# EAGLE board Schematic_ProjectTSC_v12 (EAGLE 9.7.0)
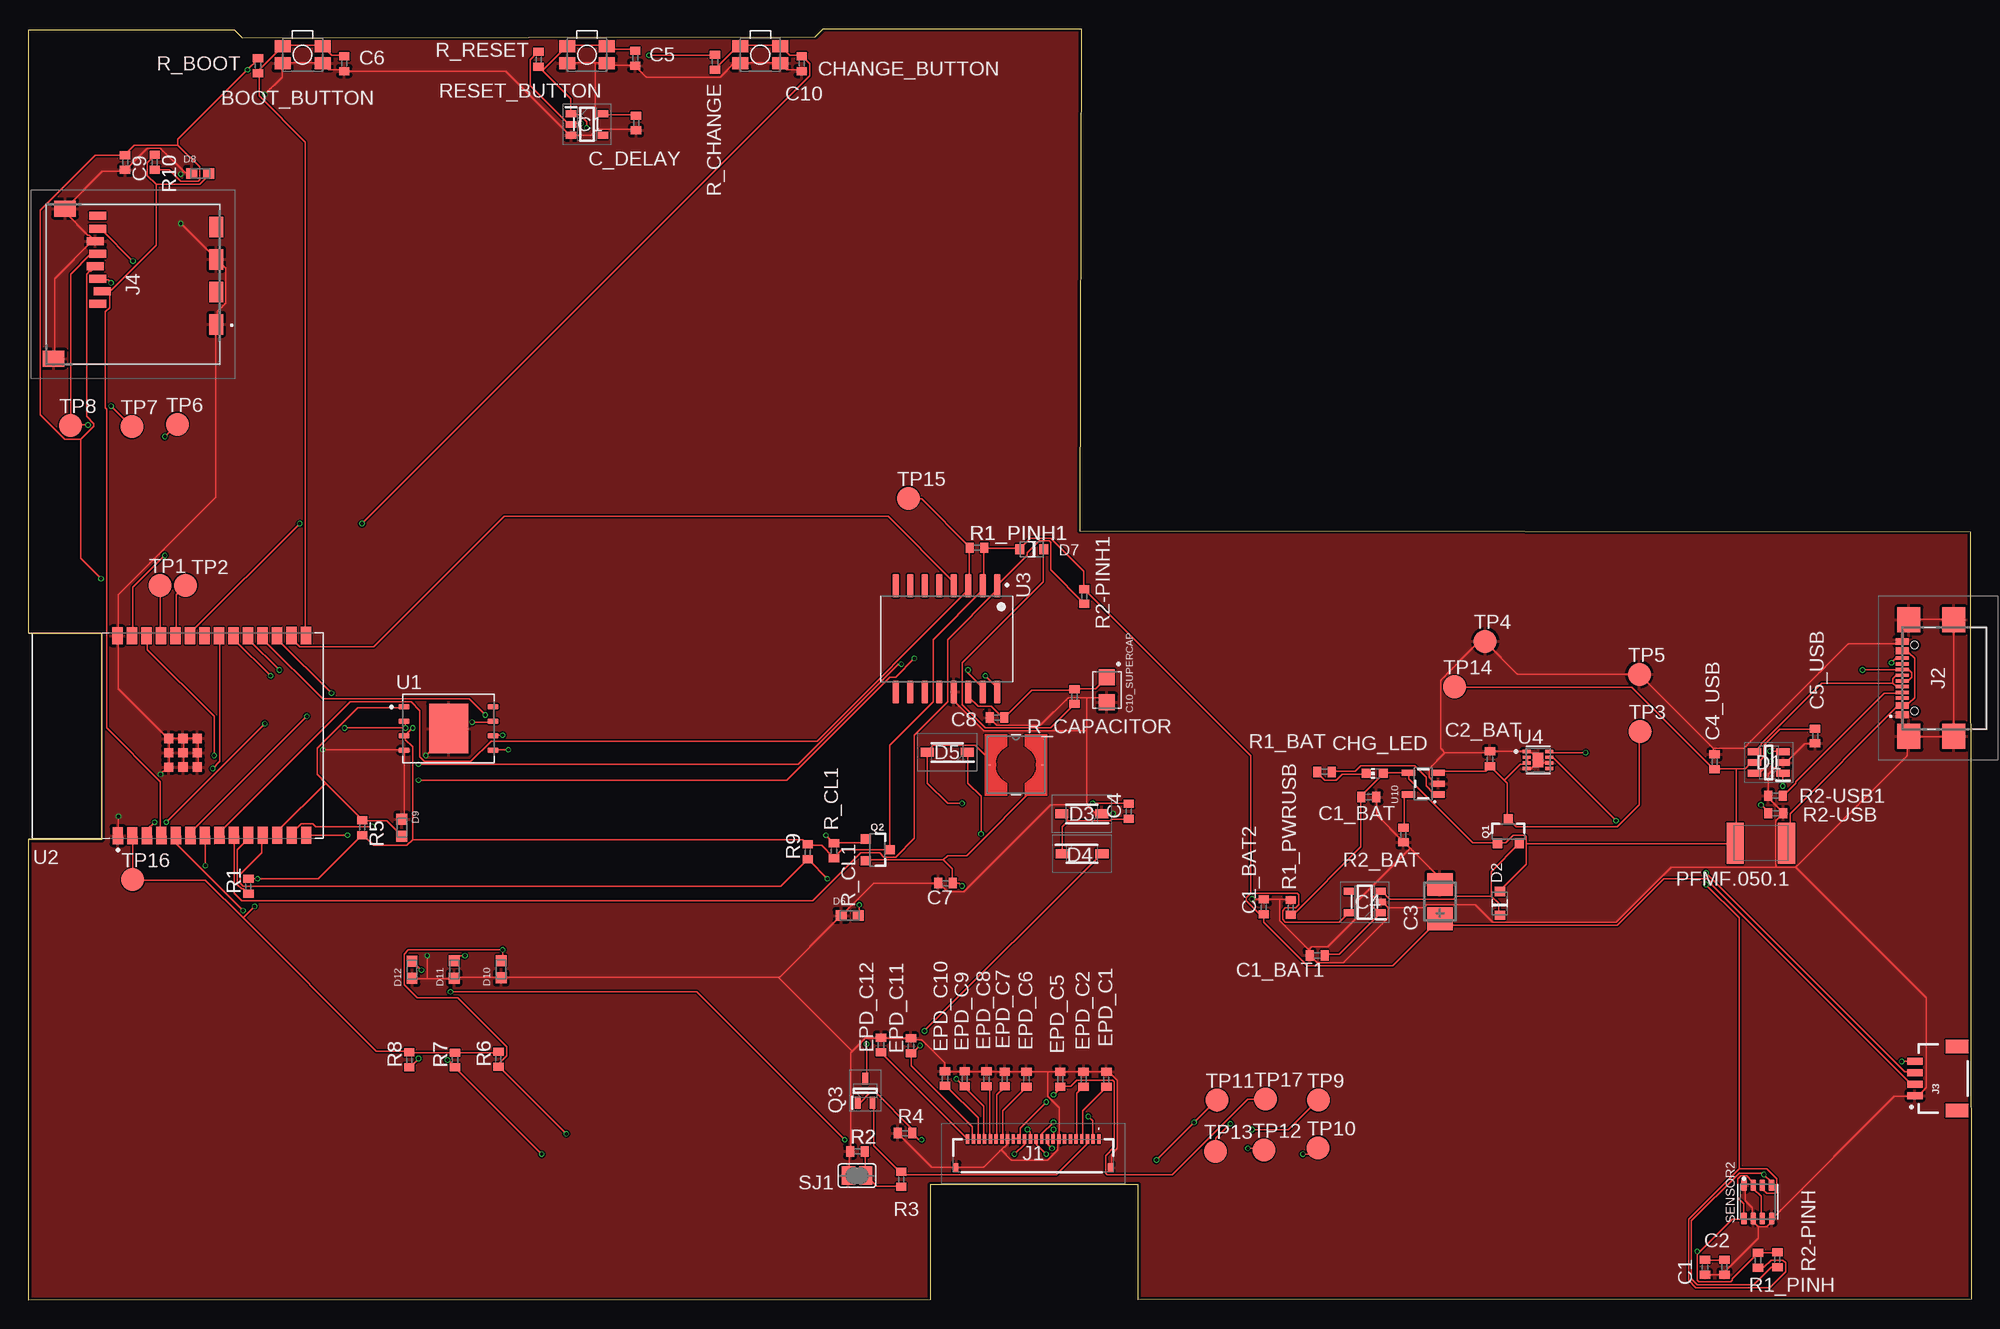
[diagram p0: board, top side]
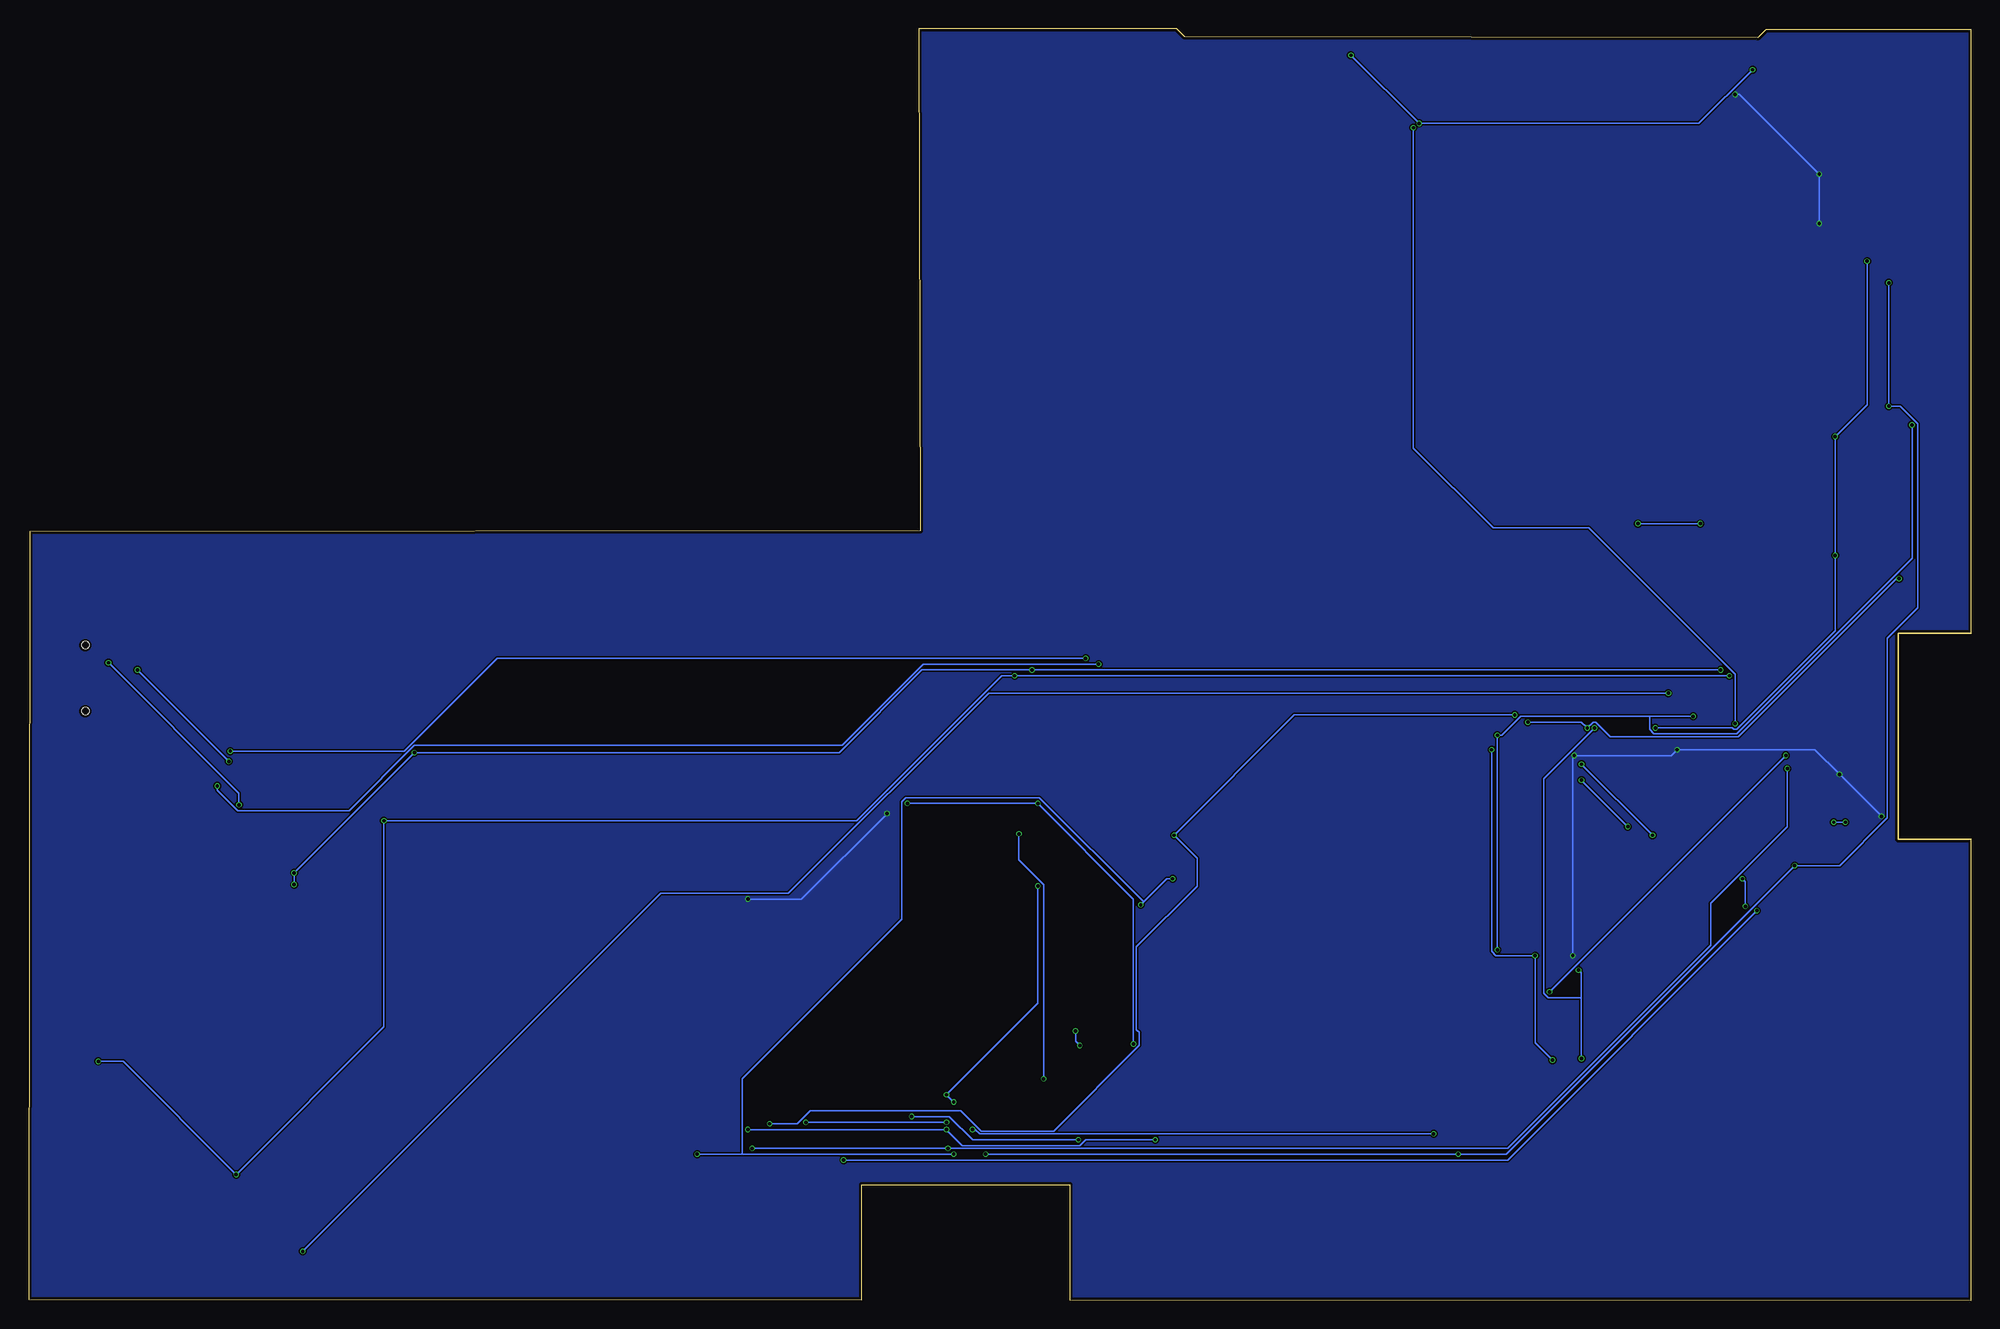
[diagram p1: board, bottom side, seen from below]

Size 170.2 x 111.4 mm. Coordinates in mm from the lower left corner, seen from the top.
Outline: 0,111.3 18,111.3 18.7,110.6 68.9,110.7 69.6,111.4 92.2,111.4 92.1,67.4 170.1,67.3 170.2,0.1 97.2,0.06 97.2,10.1 79,10.1 79,0.05 0,0 0,40.4 6.4,40.4 6.4,58.44 0,58.44 0,58.44 0,111.3
Copper layers (1*16): Top 0.035mm / dielectric 1.6mm / Bottom 0.035mm
Design rules "jlcpcb-2layers.dru": minimum track width 5mil, minimum drill 0.3mm, track to track 5mil, track to pad 5mil, pad to pad 5mil, via to via 5mil, smd to smd 5mil, copper to edge 0.2mm, drill to drill 6mil, minimum pad ring 10mil, minimum via ring 3mil, stop-mask expansion 4mil, vias tented up to drill 0mil, thermal gap 10mil

## Footprints (pad centres in the part's own frame; a part is rotated, then mirrored left to right if it is on the bottom)
MYBUTTON = smd 1.4 x 1.05: 1 1.75,0.75; 2 -1.75,0.75; 3 -1.75,-0.75; 4 1.75,-0.75
EAGLE-LTSPICE_C0402 = smd 0.7 x 0.9: 1 -0.65,0; 2 0.65,0
ESP32_WROVER_EAGLE-LTSPICE_C0402 = smd 0.7 x 0.9: 1 -0.65,0; 2 0.65,0
RCL_CT3528 = smd 2 x 2.2: + -1.5,0; - 1.5,0
CAPCP3225X100N = smd 1.4 x 1.4: 1 -1.1,0; 2 1.1,0
ADAFRUIT_CHIP-LED0603 = smd 0.8 x 0.8: A 0,-0.75; C 0,0.75
SOT95P280X145-6N = smd 1.2 x 0.6: 1 -1.25,0.95; 2 -1.25,0; 3 -1.25,-0.95; 4 1.25,-0.95; 5 1.25,0; 6 1.25,0.95
ESP32_WROVER_AVX---SD0805S020S1R0_AVX_SD0805S020S1R0_0 = smd 0.8 x 0.9: 1 -1.05,0; 2 1.05,0
SOD3716X135N = smd 1.15 x 0.8: 1 -1.75,0; 2 1.75,0
DIOC1608X36N = smd 0.97 x 0.94: 1 -0.75,0; 2 0.75,0
SOT95P280X125-5N = smd 0.9 x 0.6: 1 -1.4,0.95; 2 -1.4,0; 3 -1.4,-0.95; 4 1.4,-0.95; 5 1.4,0.95
SOT95P280X120-5N = smd 0.9 x 0.6: 1 -1.4,0.95; 2 -1.4,0; 3 -1.4,-0.95; 4 1.4,-0.95; 5 1.4,0.95
FH34SRJ24S05SH99 = smd 0.3 x 0.8: 1 5.75,1.45; 2 5.25,1.45; 3 4.75,1.45; 4 4.25,1.45; 5 3.75,1.45; 6 3.25,1.45; 7 2.75,1.45; 8 2.25,1.45; 9 1.75,1.45; 10 1.25,1.45; 11 0.75,1.45; 12 0.25,1.45; 13 -0.25,1.45; 14 -0.75,1.45; 15 -1.25,1.45; 16 -1.75,1.45; 17 -2.25,1.45; 18 -2.75,1.45; 19 -3.25,1.45; 20 -3.75,1.45; 21 -4.25,1.45; 22 -4.75,1.45; 23 -5.25,1.45; 24 -5.75,1.45 | smd 0.4 x 0.8: MP1 6.75,-1.05; MP2 -6.75,-1.05
SAMACSYS_PARTS_USB4110GFA = smd 0.3 x 1.15: A1 -3.35,3.678; A4 -2.55,3.678; A5 -1.25,3.678; A6 -0.25,3.678; A7 0.25,3.678; A8 1.25,3.678; A9 2.55,3.678; A12 3.35,3.678; B1 3.05,3.678; B4 2.25,3.678; B5 1.75,3.678; B6 0.75,3.678; B7 -0.75,3.678; B8 -1.75,3.678; B9 -2.25,3.678; B12 -3.05,3.678 | smd 2.18 x 2: MP1 -5.11,-0.827; MP2 5.11,-0.827; MP3 -5.11,3.103; MP4 5.11,3.103 | hole 0.65: -2.89,2.603; 2.89,2.603
JST04_1MM_RA = smd 0.6 x 1.35: 1 -1.5,0; 2 -0.5,0; 3 0.5,0; 4 1.5,0 | smd 1.2 x 2: NC1 2.8,-3.675; NC2 -2.8,-3.675
112ATAARR03ATTEND = smd 1.8 x 1.2: G1 10.6,10.4; G2 4.9,10.4; S1 7.75,10.4; S2 2.05,10.4 | smd 1.4 x 1.9: G3 13.6,-3.85; G4 0.45,-2.85 | smd 0.7 x 1.5: P1 8.8,0; P2 7.7,0.4; P3 6.6,0; P4 5.5,-0.2; P5 4.4,0; P6 3.3,-0.2; P7 2.2,0; P8 1.1,0
IND_4828-WE-TPC_WRE = smd 0.127 x 0.127: 1 -2.286,0; 2 2.286,0
ESP32C6_VARISTOR_CT/CN1812 = smd 1.5 x 3.6: 1 -2.25,0; 2 2.25,0
ESP32_WROVER_SPARKFUN-DISCRETESEMI_SOT23-3 = smd 0.8 x 0.9: 1 -0.95,-1; 2 0.95,-1; 3 0,1.1
SOT65P210X110-3N = smd 1.05 x 0.5: 1 -1.05,0.65; 2 -1.05,-0.65; 3 1.05,0
ESP32_WROVER_EAGLE-LTSPICE_R0402 = smd 0.7 x 0.9: 1 -0.65,0; 2 0.65,0
ESP32_WROVER_BME680_PSON80P300X300X100-8N = smd 1.016 x 0.5: 1 1.458,1.2; 2 1.458,0.4; 3 1.458,-0.4; 4 1.458,-1.2; 5 -1.458,-1.22; 6 -1.458,-0.4; 7 -1.458,0.4; 8 -1.458,1.2
SJ = smd 1.168 x 1.6: 1 -0.762,0; 2 0.762,0
TP20R = smd 2 x 2: TP 0,0
SON127P600X800X80-9N = smd 0.94 x 0.44: 1 -3.895,1.905; 2 -3.895,0.635; 3 -3.895,-0.635; 4 -3.895,-1.905; 5 3.895,-1.905; 6 3.895,-0.635; 7 3.895,0.635; 8 3.895,1.905 | smd 3.4 x 4.3: 9 0,0
XCVR_ESP32-C6-WROOM-1-N8 = smd 1.5 x 0.9: 1 -8.75,5.26; 2 -8.75,3.99; 3 -8.75,2.72; 4 -8.75,1.45; 5 -8.75,0.18; 6 -8.75,-1.09; 7 -8.75,-2.36; 8 -8.75,-3.63; 9 -8.75,-4.9; 10 -8.75,-6.17; 11 -8.75,-7.44; 12 -8.75,-8.71; 13 -8.75,-9.98; 14 -8.75,-11.25; 15 8.75,-11.25; 16 8.75,-9.98; 17 8.75,-8.71; 18 8.75,-7.44; 19 8.75,-6.17; 20 8.75,-4.9; 21 8.75,-3.63; 22 8.75,-2.36; 23 8.75,-1.09; 24 8.75,0.18; 25 8.75,1.45; 26 8.75,2.72; 27 8.75,3.99; 28 8.75,5.26 | smd 0.8 x 0.8: 29_1 -2.755,0.79; 29_2 -1.505,0.79; 29_3 -0.255,0.79; 29_4 -2.755,-0.46; 29_5 -1.505,-0.46; 29_6 -0.255,-0.46; 29_7 -2.755,-1.71; 29_8 -1.505,-1.71; 29_9 -0.255,-1.71
SOIC127P1032X265-16N = smd 2.05 x 0.59: 1 -4.655,4.445; 2 -4.655,3.175; 3 -4.655,1.905; 4 -4.655,0.635; 5 -4.655,-0.635; 6 -4.655,-1.905; 7 -4.655,-3.175; 8 -4.655,-4.445; 9 4.655,-4.445; 10 4.655,-3.175; 11 4.655,-1.905; 12 4.655,-0.635; 13 4.655,0.635; 14 4.655,1.905; 15 4.655,3.175; 16 4.655,4.445
SON50P200X200X80-9N = smd 0.76 x 0.27: 1 -0.985,0.75; 2 -0.985,0.25; 3 -0.985,-0.25; 4 -0.985,-0.75; 5 0.985,-0.75; 6 0.985,-0.25; 7 0.985,0.25; 8 0.985,0.75 | smd 0.9 x 1.3: 9 0,0
ESP32_WROVER_SPARKFUN-IC-POWER_SOT23-5 = smd 0.55 x 1.2: 1 -0.95,-1.3; 2 0,-1.3; 3 0.95,-1.3; 4 0.95,1.3; 5 -0.95,1.3

## Placement (x,y rotation side)
BOOT_BUTTON  BUTTON_CUSYOMV1  [MYBUTTON]  24,109.09 180 top
C1  100uF  [EAGLE-LTSPICE_C0402]  146.86,2.88 270 top
C1_BAT  4.7uF  [ESP32_WROVER_EAGLE-LTSPICE_C0402]  117.41,44.08 0 top
C1_BAT1  4.7uF  [EAGLE-LTSPICE_C0402]  112.88,30.2 180 top
C1_BAT2  4.7uF  [EAGLE-LTSPICE_C0402]  108.2,34.46 90 top
C2  100nF  [EAGLE-LTSPICE_C0402]  148.56,2.9 270 top
C2_BAT  4.7uF  [ESP32_WROVER_EAGLE-LTSPICE_C0402]  128.02,47.42 90 top
C3  100uF TANT  [RCL_CT3528]  123.64,34.92 90 top
C4  4.7uF/25V  [ESP32_WROVER_EAGLE-LTSPICE_C0402]  96.38,42.82 90 top
C4_USB  100nF  [EAGLE-LTSPICE_C0402]  147.7,47.17 90 top
C5  1uF  [ESP32_WROVER_EAGLE-LTSPICE_C0402]  53.14,108.8 270 top
C5_USB  4.7uF  [EAGLE-LTSPICE_C0402]  156.5,49.42 270 top
C6  100nF  [ESP32_WROVER_EAGLE-LTSPICE_C0402]  27.66,108.32 270 top
C7  10uF  [ESP32_WROVER_EAGLE-LTSPICE_C0402]  80.33,36.54 180 top
C8  100nF  [EAGLE-LTSPICE_C0402]  84.84,51.04 180 top
C9  100nF  [EAGLE-LTSPICE_C0402]  8.46,99.66 270 top
C10  100nF  [ESP32_WROVER_EAGLE-LTSPICE_C0402]  67.74,108.32 270 top
C10_SUPERCAP  CPH3225A  [CAPCP3225X100N]  94.47,53.47 270 top
C_DELAY  100nF  [ESP32_WROVER_EAGLE-LTSPICE_C0402]  53.22,103.12 270 top
CHANGE_BUTTON  BUTTON_CUSYOMV1  [MYBUTTON]  64.11,109.12 180 top
CHG_LED  [ADAFRUIT_CHIP-LED0603]  117.93,46.15 90 top
D1  USBLC6-2SC6Y  [SOT95P280X145-6N]  152.45,47.1 180 top
D2  ESP32_WROVER_AVX---SD0805S020S1R0_AVX_SD0805S020S1R0_0_0AVX_SD0805S020S1R0_0_0  [ESP32_WROVER_AVX---SD0805S020S1R0_AVX_SD0805S020S1R0_0]  128.89,34.76 90 top
D3  MBR0530  [SOD3716X135N]  92.27,42.6 180 top
D4  MBR0530  [SOD3716X135N]  92.29,39.11 0 top
D5  MBR0530  [SOD3716X135N]  80.47,47.99 180 top
D6  PGB1010603MR  [DIOC1608X36N]  71.93,33.7 0 top
D7  ESP32_WROVER_AVX---SD0805S020S1R0_AVX_SD0805S020S1R0_0_0AVX_SD0805S020S1R0_0_0  [ESP32_WROVER_AVX---SD0805S020S1R0_AVX_SD0805S020S1R0_0]  87.89,65.79 180 top
D8  PGB1010603MR  [DIOC1608X36N]  15.03,98.7 0 top
D9  PGB1010603MR  [DIOC1608X36N]  32.7,41.39 270 top
D10  PGB1010603MR  [DIOC1608X36N]  41.4,28.99 90 top
D11  PGB1010603MR  [DIOC1608X36N]  37.3,28.97 90 top
D12  PGB1010603MR  [DIOC1608X36N]  33.6,28.95 90 top
EPD_C1  1uF/50V  [ESP32_WROVER_EAGLE-LTSPICE_C0402]  94.42,19.35 90 top
EPD_C2  1uF/50V  [ESP32_WROVER_EAGLE-LTSPICE_C0402]  92.42,19.36 90 top
EPD_C5  0.1uF/50V  [ESP32_WROVER_EAGLE-LTSPICE_C0402]  90.38,19.36 90 top
EPD_C6  1uF/50V  [ESP32_WROVER_EAGLE-LTSPICE_C0402]  87.42,19.37 90 top
EPD_C7  1uF/50V  [ESP32_WROVER_EAGLE-LTSPICE_C0402]  85.52,19.38 90 top
EPD_C8  1uF/50V  [ESP32_WROVER_EAGLE-LTSPICE_C0402]  83.92,19.39 90 top
EPD_C9  1uF/50V  [ESP32_WROVER_EAGLE-LTSPICE_C0402]  82.02,19.4 90 top
EPD_C10  1uF/50V  [ESP32_WROVER_EAGLE-LTSPICE_C0402]  80.28,19.42 90 top
EPD_C11  1uF/50V  [ESP32_WROVER_EAGLE-LTSPICE_C0402]  77.3,22.28 90 top
EPD_C12  1uF/50V  [ESP32_WROVER_EAGLE-LTSPICE_C0402]  74.68,22.36 90 top
IC1  BD5229G-TR  [SOT95P280X125-5N]  48.92,103 0 top
IC4  XC6220A331MR-G  [SOT95P280X120-5N]  117.05,34.88 180 top
J1  FH34SRJ-24S-0.5SH_99_  [FH34SRJ24S05SH99]  88.01,12.67 0 top
J2  SAMACSYS_PARTS_USB4110-GF-A  [SAMACSYS_PARTS_USB4110GFA]  167.82,54.5 90 top
J3  QWIIC_RIGHT_ANGLE  [JST04_1MM_RA]  165.25,19.43 90 top
J4  112A-TAAR-R03_ATTEND  [112ATAARR03ATTEND]  6.05,96.08 270 top
L1  744043680IND_4828-WE-TPC_WRE  [IND_4828-WE-TPC_WRE]  86.5,46.9 0 top
PFMF.050.1  ESP32C6_VARISTORCN1812  [ESP32C6_VARISTOR_CT/CN1812]  151.75,40.04 180 top
Q1  20V/4.2A/52mΩ/1.4W  [ESP32_WROVER_SPARKFUN-DISCRETESEMI_SOT23-3]  129.63,41.03 0 top
Q2  20V/4.2A/52mΩ/1.4W  [ESP32_WROVER_SPARKFUN-DISCRETESEMI_SOT23-3]  74.33,39.45 270 top
Q3  SI1308EDL-T1-GE3  [SOT65P210X110-3N]  73.29,18.36 90 top
R1  10K  [ESP32_WROVER_EAGLE-LTSPICE_R0402]  19.26,36.26 90 top
R1_BAT  200  [ESP32_WROVER_EAGLE-LTSPICE_R0402]  113.53,46.28 0 top
R1_PINH  10K  [ESP32_WROVER_EAGLE-LTSPICE_R0402]  151.5,3.5 90 top
R1_PINH1  10K  [ESP32_WROVER_EAGLE-LTSPICE_R0402]  83.08,65.92 0 top
R1_PWRUSB  100k  [ESP32_WROVER_EAGLE-LTSPICE_R0402]  110.57,34.41 270 top
R2  2.2  [ESP32_WROVER_EAGLE-LTSPICE_R0402]  72.62,13.04 0 top
R2-PINH  10K  [ESP32_WROVER_EAGLE-LTSPICE_R0402]  153.2,3.56 90 top
R2-PINH1  10K  [ESP32_WROVER_EAGLE-LTSPICE_R0402]  92.48,61.64 90 top
R2-USB  5K1  [ESP32_WROVER_EAGLE-LTSPICE_R0402]  153.06,42.66 0 top
R2-USB1  5k1  [ESP32_WROVER_EAGLE-LTSPICE_R0402]  153.04,44.2 0 top
R2_BAT  2K  [ESP32_WROVER_EAGLE-LTSPICE_R0402]  120.44,40.75 90 top
R3  0.47  [ESP32_WROVER_EAGLE-LTSPICE_R0402]  76.44,10.59 90 top
R4  10K  [ESP32_WROVER_EAGLE-LTSPICE_R0402]  76.78,14.64 0 top
R5  10K  [ESP32_WROVER_EAGLE-LTSPICE_R0402]  29.24,41.4 270 top
R6  10K  [ESP32_WROVER_EAGLE-LTSPICE_R0402]  41.16,21.12 90 top
R7  10K  [ESP32_WROVER_EAGLE-LTSPICE_R0402]  37.36,21.04 90 top
R8  10K  [ESP32_WROVER_EAGLE-LTSPICE_R0402]  33.36,21.06 90 top
R9  10K  [ESP32_WROVER_EAGLE-LTSPICE_R0402]  68.26,39.28 90 top
R10  10K  [ESP32_WROVER_EAGLE-LTSPICE_R0402]  11.06,99.69 270 top
R_BOOT  10K  [ESP32_WROVER_EAGLE-LTSPICE_R0402]  20.1,108.15 90 top
R_CAPACITOR  15  [ESP32_WROVER_EAGLE-LTSPICE_R0402]  91.63,52.89 90 top
R_CHANGE  10K  [ESP32_WROVER_EAGLE-LTSPICE_R0402]  60.13,108.46 90 top
R_CL1  10K  [ESP32_WROVER_EAGLE-LTSPICE_R0402]  70.56,39.36 270 top
R_RESET  10K  [ESP32_WROVER_EAGLE-LTSPICE_R0402]  44.68,108.7 90 top
RESET_BUTTON  BUTTON_CUSYOMV1  [MYBUTTON]  48.92,109.12 180 top
SENSOR2  ESP32_WROVER_BME680_BME680  [ESP32_WROVER_BME680_PSON80P300X300X100-8N]  151.48,8.61 90 top
SJ1  [SJ]  72.58,10.92 0 top
TP1  TPTP20R  [TP20R]  11.53,62.62 0 top
TP2  TPTP20R  [TP20R]  13.75,62.62 0 top
TP3  TPTP20R  [TP20R]  141.17,49.82 0 top
TP4  TPTP20R  [TP20R]  127.59,57.72 0 top
TP5  TPTP20R  [TP20R]  141.11,54.82 0 top
TP6  TPTP20R  [TP20R]  13.03,76.72 0 top
TP7  TPTP20R  [TP20R]  9.05,76.52 0 top
TP8  TPTP20R  [TP20R]  3.67,76.62 0 top
TP9  TPTP20R  [TP20R]  112.99,17.52 0 top
TP10  TPTP20R  [TP20R]  112.97,13.34 0 top
TP11  TPTP20R  [TP20R]  104.11,17.52 0 top
TP12  TPTP20R  [TP20R]  108.22,13.14 0 top
TP13  TPTP20R  [TP20R]  103.97,13.04 0 top
TP14  TPTP20R  [TP20R]  124.92,53.74 0 top
TP15  TPTP20R  [TP20R]  77.07,70.24 0 top
TP16  TPTP20R  [TP20R]  9.12,36.84 0 top
TP17  TPTP20R  [TP20R]  108.36,17.62 0 top
U1  W25Q512JVEIQ  [SON127P600X800X80-9N]  36.8,50.08 0 top
U2  ESP32-C6-WROOM-1-N8  [XCVR_ESP32-C6-WROOM-1-N8]  13.07,49.46 90.1 top
U3  DS3231SN#  [SOIC127P1032X265-16N]  80.42,57.94 270 top
U4  MAX17048G+T10  [SON50P200X200X80-9N]  132.24,47.32 0 top
U10  ESP32_WROVER_SPARKFUN-IC-POWER_MCP73831  [ESP32_WROVER_SPARKFUN-IC-POWER_SOT23-5]  122.18,45.25 90 top

## Library data of the parts
BOOT_BUTTON CHANGE_BUTTON CHG_LED PFMF.050.1 SJ1 TP1-TP17 = DeskAssistant v19 v1
C1 C1_BAT C1_BAT1 C1_BAT2 C2 C2_BAT C4 C4_USB C5 C5_USB C6-C10 C_DELAY EPD_C1 EPD_C2 EPD_C5-EPD_C12 = DeskAssistant v19 v1; SPICEMODEL: NONE; SPICEPREFIX: C
C3 = DeskAssistant v19 v1; SPICEPREFIX: C
C10_SUPERCAP = DeskAssistant v19 v1; AVAILABILITY: Not in stock; CHECK_PRICES: https://www.snapeda.com/parts/CPH3225A/Seiko+Instruments/view-part/?ref=eda; DESCRIPTION: 11 mF (EDLC) Supercapacitor 3.3 V 1210 (3225 Metric) - -; MF: Seiko Instruments; MP: CPH3225A; PACKAGE: 1210 Seiko; PRICE: None; PURCHASE-URL: https://www.snapeda.com/api/url_track_click_mouser/?unipart_id=562593&manufacturer=Seiko Instruments&part_name=CPH3225A&search_term=None; SNAPEDA_LINK: https://www.snapeda.com/parts/CPH3225A/Seiko+Instruments/view-part/?ref=snap
D1 = DeskAssistant v19 v1; AVAILABILITY: In Stock; CHECK_PRICES: https://www.snapeda.com/parts/USBLC6-2SC6Y/STMicroelectronics/view-part/?ref=eda; DESCRIPTION: 17V Clamp 5A (8/20µs) Ipp Tvs Diode Surface Mount SOT-23-6; MF: STMicroelectronics; MP: USBLC6-2SC6Y; PACKAGE: SOT-23-6 STMicroelectronics; PRICE: None; SNAPEDA_LINK: https://www.snapeda.com/parts/USBLC6-2SC6Y/STMicroelectronics/view-part/?ref=snap
D2 = DeskAssistant v19 v1; CENTROID_NOT_SPECIFIED: No; DATASHEET: http://datasheets.avx.com/schottky.pdf; DIGIKEY_DESCRIPTION: DIODE SCHOTTKY 20V 1A 0805; DIGIKEY_PART_NUMBER: 478-7800-1-ND; LEAD_FREE: yes; MF: AVX; MOUSER_PART_NUMBER: 581-SD0805S020S1R0; PACKAGE: 0805 (2012 metric); PREFIX: D; ROHS: yes; SHOW: SD0805S020S1R0; TEMPERATURE_RANGE_HIGH: +125°C; TEMPERATURE_RANGE_LOW: -55°C
D3-D5 = DeskAssistant v19 v1; AVAILABILITY: In Stock; CHECK_PRICES: https://www.snapeda.com/parts/MBR0530/Onsemi/view-part/?ref=eda; DESCRIPTION: Diode Schottky 30 V 500mA Surface Mount SOD-123; MF: ON Semiconductor; MP: MBR0530; PACKAGE: SOD-123-2 ON Semiconductor; PRICE: None; PURCHASE-URL: https://www.snapeda.com/api/url_track_click_mouser/?unipart_id=179458&manufacturer=ON Semiconductor&part_name=MBR0530&search_term=None; SNAPEDA_LINK: https://www.snapeda.com/parts/MBR0530/Onsemi/view-part/?ref=snap
D6 D8-D12 = DeskAssistant v19 v1; AVAILABILITY: In Stock; CHECK_PRICES: https://www.snapeda.com/parts/PGB1010603MR/Littelfuse/view-part/?ref=eda; DESCRIPTION: 150V (Typ) Clamp - Ipp Tvs Diode Surface Mount 0603 (1608 Metric); MF: Littelfuse Inc.; MP: PGB1010603MR; PACKAGE: 0603 Littelfuse Inc.; PRICE: None; PURCHASE-URL: https://www.snapeda.com/api/url_track_click_mouser/?unipart_id=5659453&manufacturer=Littelfuse Inc.&part_name=PGB1010603MR&search_term=None; SNAPEDA_LINK: https://www.snapeda.com/parts/PGB1010603MR/Littelfuse/view-part/?ref=snap
D7 = DeskAssistant v19 v1; CENTROID_NOT_SPECIFIED: No; DATASHEET: http://datasheets.avx.com/schottky.pdf; DIGIKEY_DESCRIPTION: DIODE SCHOTTKY 20V 1A 0805; DIGIKEY_PART_NUMBER: 478-7800-1-ND; LEAD_FREE: yes; MF: AVX; MOUSER_PART_NUMBER: 581-SD0805S020S1R0; PACKAGE: 0805 (2012 metric); PREFIX: D; ROHS: yes; TEMPERATURE_RANGE_HIGH: +125°C; TEMPERATURE_RANGE_LOW: -55°C
IC1 = DeskAssistant v19 v1; DESCRIPTION: Voltage Detector with Adjustable Delay Time: CMOS processes are utilized to develop high precision, low current consumption CMOS reset ICs that allow arbitrary setting of the delay time. The extensive lineup includes both Nch Open Drain and CMOS output types in a wide range of detection voltages (from 2.3V to 6.0V, in 0.1V steps), enabling selection of the ideal solution based on customer requirements. In addition, the entire series is of course both lead-free and RoHS-compliant.; HEIGHT: 1.25mm; MANUFACTURER_NAME: ROHM Semiconductor; MANUFACTURER_PART_NUMBER: BD5229G-TR; MOUSER_PART_NUMBER: 755-BD5229G-TR; MOUSER_PRICE-STOCK: https://www.mouser.co.uk/ProductDetail/ROHM-Semiconductor/BD5229G-TR?qs=4kLU8WoGk0vvnhrrYwdszw%3D%3D
IC4 = DeskAssistant v19 v1; DESCRIPTION: LDO Voltage Regulators; HEIGHT: 1.2mm; MANUFACTURER_NAME: Torex; MANUFACTURER_PART_NUMBER: XC6220A331MR-G; MOUSER_PART_NUMBER: 865-XC6220A331MR-G; MOUSER_PRICE-STOCK: https://www.mouser.co.uk/ProductDetail/Torex-Semiconductor/XC6220A331MR-G?qs=AsjdqWjXhJ8ZSWznL1J0gg%3D%3D
J1 = DeskAssistant v19 v1; DESCRIPTION: 24 Position FFC, FPC Connector Contacts, Top and Bottom 0.020" (0.50mm) Surface Mount, Right Angle; HEIGHT: 1.1mm; MANUFACTURER_NAME: Hirose; MANUFACTURER_PART_NUMBER: FH34SRJ-24S-0.5SH(99); MOUSER_PART_NUMBER: 798-FH34SRJ24S05SH99; MOUSER_PRICE-STOCK: https://www.mouser.co.uk/ProductDetail/Hirose-Connector/FH34SRJ-24S-0.5SH99?qs=vcbW%252B4%252BSTIpKBl5ap9J8Fw%3D%3D
J2 = DeskAssistant v19 v1; DESCRIPTION: CONN USB 2.0 TYPE-C R/A SMT; HEIGHT: 3.26mm; MANUFACTURER_NAME: GCT (GLOBAL CONNECTOR TECHNOLOGY); MANUFACTURER_PART_NUMBER: USB4110-GF-A; MOUSER_PART_NUMBER: 640-USB4110-GF-A; MOUSER_PRICE-STOCK: https://www.mouser.co.uk/ProductDetail/GCT/USB4110-GF-A?qs=KUoIvG%2F9IlYiZvIXQjyJeA%3D%3D
J3 = DeskAssistant v19 v1; PROD_ID: CONN-13694
J4 = DeskAssistant v19 v1; DESCRIPTION: Micro SD Card Socket, Push-Push Type, Top Mount, SMT, H=1.83mm, 10u; HEIGHT: 1.9mm; MANUFACTURER_NAME: ATTEND; MANUFACTURER_PART_NUMBER: 112A-TAAR-R03 ATTEND
L1 = DeskAssistant v19 v1; COPYRIGHT: Copyright (C) 2024 Ultra Librarian. All rights reserved.; MANUFACTURER_PART_NUMBER: 744043680; MFR_NAME: Wurth Electronics
Q1 Q2 = DeskAssistant v19 v1; PROD_ID: TRAN-14388
Q3 = DeskAssistant v19 v1; AVAILABILITY: In Stock; CHECK_PRICES: https://www.snapeda.com/parts/SI1308EDL-T1-GE3/Vishay+Siliconix/view-part/?ref=eda; DESCRIPTION: Si1308EDL-T1-GE3 N-channel MOSFET Transistor, 1.5 A, 30 V, 3-Pin SC-70 | Siliconix / Vishay SI1308EDL-T1-GE3; MF: Vishay Siliconix; MP: SI1308EDL-T1-GE3; PACKAGE: SOT-323 Vishay Semiconductor; PRICE: None; PURCHASE-URL: https://www.snapeda.com/api/url_track_click_mouser/?unipart_id=274603&manufacturer=Vishay Siliconix&part_name=SI1308EDL-T1-GE3&search_term=None; SNAPEDA_LINK: https://www.snapeda.com/parts/SI1308EDL-T1-GE3/Vishay+Siliconix/view-part/?ref=snap
R1 R1_BAT R1_PINH R1_PINH1 R1_PWRUSB R2 R2-PINH R2-PINH1 R2-USB R2-USB1 R2_BAT R3-R10 R_BOOT R_CAPACITOR R_CHANGE R_CL1 R_RESET = DeskAssistant v19 v1; SPICEMODEL: NONE; SPICEPREFIX: R
RESET_BUTTON = DeskAssistant v19 v1; SHOW_NAME: RESET_BUTTON
SENSOR2 = DeskAssistant v19 v1; AVAILABILITY: Unavailable; DESCRIPTION: Integrated Environmental Unit; MF: Bosch Sensortec; MP: BME680; PACKAGE: LGA-8 Bosch Tools; PRICE: None
U1 = DeskAssistant v19 v1; AVAILABILITY: In Stock; CHECK_PRICES: https://www.snapeda.com/parts/W25Q512JVEIQ/Winbond+Electronics/view-part/?ref=eda; DESCRIPTION: FLASH - NOR Memory IC 512Mb (64M x 8) SPI - Quad I/O 133 MHz 8-WSON (8x6); MF: Winbond Electronics; MP: W25Q512JVEIQ; PACKAGE: Package; PRICE: None; SNAPEDA_LINK: https://www.snapeda.com/parts/W25Q512JVEIQ/Winbond+Electronics/view-part/?ref=snap
U2 = DeskAssistant v19 v1; AVAILABILITY: In Stock; CHECK_PRICES: https://www.snapeda.com/parts/ESP32-C6-WROOM-1-N8/Espressif+Systems/view-part/?ref=eda; DESCRIPTION: Multiprotocol Modules ESP32-C6 module, Wi-Fi 6 in 2.4 GHz band, Bluetooth 5, Zigbee 3.0 and Thread. ESP34-WROOM Compatible - ENGINEERING SAMPLE; MF: Espressif Systems; MP: ESP32-C6-WROOM-1-N8; PACKAGE: None; PRICE: None; SNAPEDA_LINK: https://www.snapeda.com/parts/ESP32-C6-WROOM-1-N8/Espressif+Systems/view-part/?ref=snap
U3 = DeskAssistant v19 v1; AVAILABILITY: In Stock; CHECK_PRICES: https://www.snapeda.com/parts/DS3231SN%23/Analog+Devices/view-part/?ref=eda; DESCRIPTION: Extremely Accurate I²C-Integrated RTC/TCXO/Crystal; MF: Analog Devices; MP: DS3231SN#; PACKAGE: SOIC-16 Maxim; PRICE: None; PURCHASE-URL: https://www.snapeda.com/api/url_track_click_mouser/?unipart_id=99048&manufacturer=Analog Devices&part_name=DS3231SN#&search_term=None; SNAPEDA_LINK: https://www.snapeda.com/parts/DS3231SN%23/Analog+Devices/view-part/?ref=snap
U4 = DeskAssistant v19 v1; AVAILABILITY: In Stock; CHECK_PRICES: https://www.snapeda.com/parts/MAX17048G+T10/Analog+Devices/view-part/?ref=eda; DESCRIPTION: 3µA 1-Cell/2-Cell Fuel Gauge with ModelGauge; MF: Analog Devices; MP: MAX17048G+T10; PACKAGE: TDFN-8 Maxim; PRICE: None; PURCHASE-URL: https://www.snapeda.com/api/url_track_click_mouser/?unipart_id=329239&manufacturer=Analog Devices&part_name=MAX17048G+T10&search_term=None; SNAPEDA_LINK: https://www.snapeda.com/parts/MAX17048G+T10/Analog+Devices/view-part/?ref=snap
U10 = DeskAssistant v19 v1; PROD_ID: IC-09995

## Nets
3V3: C1_BAT2.1 C3.+ C9.1 D7.2 IC1.2 IC4.5 J3.2 J4.P4 Q2.3 R1.2 R1_PINH1.2 R2-PINH1.2 R5.2 R6.2 R7.2 R8.2 R9.2 R10.2 R_BOOT.2 R_CHANGE.2 R_CL1.2 R_RESET.2 TP16.TP U1.3 U1.7 U1.8 U2.2 U3.2
32KHZ: R2-PINH1.1 U2.9 U3.1
DN: D1.4 J2.A7 J2.B7
DP: D1.6 J2.A6 J2.B6
EPD_3V3: C7.1 EPD_C5.1 J1.15 J1.16 L1.2 Q2.2 TP17.TP
EPD_3V3_C: Q2.1 R_CL1.1 TP13.TP U2.18
EPD_BUSY: J1.9 TP9.TP U2.26
EPD_CS: D6.2 J1.12 R9.1 TP10.TP U2.11
EPD_DC: J1.11 TP11.TP U2.5
EPD_RST: J1.10 TP12.TP U2.21
FLASH_CS: D9.2 R5.1 U1.1 U2.12
GDR: J1.2 Q3.1 R4.2
GND: BOOT_BUTTON.1 BOOT_BUTTON.2 C1.2 C1_BAT1.2 C1_BAT2.2 C1_BAT.2 C2.2 C2_BAT.2 C3.- C4_USB.2 C5.2 C5_USB.2 C6.2 C7.2 C8.2 C9.2 C10.2 C10_SUPERCAP.2 C_DELAY.2 CHANGE_BUTTON.1 CHANGE_BUTTON.2 D1.2 D3.1 D6.1 D8.1 D9.1 D10.1 D11.1 D12.1 EPD_C1.2 EPD_C2.2 EPD_C5.2 EPD_C6.2 EPD_C7.2 EPD_C8.2 EPD_C9.2 EPD_C10.2 EPD_C11.2 EPD_C12.2 IC1.3 IC4.2 J1.8 J1.17 J1.MP1 J1.MP2 J2.A1 J2.A12 J2.B1 J2.B12 J2.MP1 J2.MP2 J2.MP3 J2.MP4 J3.1 J4.G1 J4.G2 J4.G3 J4.G4 J4.P6 R1_PWRUSB.1 R2-USB1.1 R2-USB.2 R2.1 R2_BAT.1 R4.1 RESET_BUTTON.1 RESET_BUTTON.2 SENSOR2.1 SENSOR2.5 SENSOR2.7 SJ1.1 TP4.TP TP5.TP U1.4 U1.9 U2.1 U2.28 U2.29_1 U2.29_2 U2.29_3 U2.29_4 U2.29_5 U2.29_6 U2.29_7 U2.29_8 U2.29_9 U3.13 U4.1 U4.4 U4.6 U4.9 U10.2
GPIO8: R1.1 U2.10
I2C_PW: R1_PINH.2 R2-PINH.2 SENSOR2.2 SENSOR2.6 SENSOR2.8 U2.17
INT_RTC: R1_PINH1.1 TP15.TP U2.8 U3.3
IO/BOOT: BOOT_BUTTON.3 BOOT_BUTTON.4 C6.1 R_BOOT.1 U2.15
IO/CHANGE: C10.1 CHANGE_BUTTON.3 CHANGE_BUTTON.4 R_CHANGE.1 U2.23
MISO: D12.2 J4.P7 R8.1 TP6.TP U1.2 U2.27
MOSI: D11.2 J1.14 J4.P3 R7.1 TP7.TP U1.5 U2.7
N$1: C1_BAT1.1 D2.1 IC4.1 IC4.3 Q1.2
N$2: J2.B5 R2-USB.1
N$3: R2_BAT.2 U10.5
N$4: J2.A5 R2-USB1.2
N$5: C1.1 C2.1
N$6: C4.1 D3.2 D4.1
N$7: C_DELAY.1 IC1.5
N$8: CHG_LED.C R1_BAT.1
N$9: R1_BAT.2 U10.1
N$15: EPD_C2.1 J1.5
N$16: EPD_C1.1 J1.4
N$19: EPD_C12.1 J1.24
N$20: D7.1 R_CAPACITOR.1
N$21: EPD_C10.1 J1.22
N$23: EPD_C8.1 J1.20
N$24: EPD_C7.1 J1.19
N$25: EPD_C6.1 J1.18
PREVGH: D5.1 EPD_C9.1 J1.21
PREVGL: D4.2 EPD_C11.1 J1.23
RESE: J1.3 Q3.2 R3.2
RESE': R2.2 R3.1 SJ1.2
RESET: C5.1 IC1.1 R_RESET.1 RESET_BUTTON.3 RESET_BUTTON.4 U2.3
RTC_RST: U2.16 U3.4
RX: TP2.TP U2.24
SCK: D10.2 J1.13 J4.P5 R6.1 TP8.TP U1.6 U2.6
SCL: J3.4 R2-PINH.1 SENSOR2.4 U2.20 U3.16 U4.7
SDA: J3.3 R1_PINH.1 SENSOR2.3 U2.19 U3.15 U4.8
SRC: C4.2 D5.2 L1.1 Q3.3
SS_SD: D8.2 J4.P2 R10.1 U2.4
TX: TP1.TP U2.25
USB_D+: D1.1 U2.14
USB_D-: D1.3 U2.13
VBAT: C2_BAT.1 Q1.3 TP3.TP U4.2 U4.3 U10.3
VBUS: C1_BAT.1 C4_USB.1 C5_USB.1 CHG_LED.A D1.5 D2.2 PFMF.050.1.2 Q1.1 R1_PWRUSB.2 TP14.TP U10.4
VRTC: C8.1 C10_SUPERCAP.1 R_CAPACITOR.2 U3.14
VUSB: J2.A4 J2.A9 J2.B4 J2.B9 PFMF.050.1.1

## Tracks (layer width: path | path; a pad name or v marks a point on that pad's centre or on a via)
3V3  (via drill 0.3)
  Top 0.127: R_RESET.2 44.58,109.31 43.94,108.68 43.94,106.39 47.24,103.09 47.5,103.09 IC1.2 47.62,103.09 v48.39,103.09 | v54.36,109.06 60.07,109.06 R_CHANGE.2 | 13.08,101.18 14.99,99.28 14.99,98.14 14.86,98.01 13.34,98.01 12.32,99.02 11.18,99.02 R10.2 | 13.08,101.18 9.27,101.18 8.51,100.42 C9.1 8.38,100.29 5.84,100.29 1.02,95.47 1.02,77.56 3.17,75.4 4.57,75.4 | 13.08,101.18 13.08,101.69 v19.18,107.79 20.07,108.68 R_BOOT.2 | 4.57,75.4 5.71,76.55 5.71,76.8 5.08,77.43 5.08,89.88 5.33,90.13 5.46,90.13 5.84,90.52 J4.P4 | 107.06,35.65 106.68,35.27 106.68,35.02 107.82,33.87 108.08,33.87 C1_BAT2.1 108.2,33.75 108.2,33.11 112.01,29.3 119.51,29.3 123.57,33.36 C3.+ 123.7,33.36 124.21,32.86 139.19,32.86 143.26,36.92 147.07,36.92 147.45,36.54 147.45,36.41 164.85,19.01 165.23,19.01 J3.2 | 107.06,35.65 111.12,35.65 111.25,35.52 111.25,34.64 111,34.38 110.11,34.38 109.86,34.13 109.86,33.36 110.11,33.11 114.81,33.11 115.57,33.87 IC4.5 | U2.2 9.14,40.6 9.14,36.92 TP16.TP 9.14,36.79 15.49,36.79 18.8,33.49 | R6.2 41.15,21.68 37.47,21.68 R7.2 37.34,21.68 33.4,21.68 R8.2 33.27,21.81 30.48,21.81 18.8,33.49 | U1.8 40.77,51.91 40.77,50.76 U1.7 40.64,50.64 v38.86,50.64 | R1.2 19.3,36.92 v20.07,36.92 25.4,36.92 29.21,40.73 R5.2 29.34,40.73 30.23,39.84 33.15,39.84 33.66,40.35 | 33.66,40.35 33.66,48.48 33.02,49.11 33.02,49.37 U1.3 33.02,49.49 v33.66,50.13 | 33.66,40.35 67.82,40.35 68.2,39.97 R9.2 68.33,39.84 69.47,39.84 70.48,38.83 R_CL1.2 70.61,38.83 71.25,39.46 75.31,39.46 Q2.3 75.44,39.46 75.44,48.61 79.25,52.42 79.25,57.88 83.57,62.19 83.57,62.58 U3.2 83.69,62.7 83.69,65.88 R1_PINH1.2 83.82,65.88 86.74,65.88 D7.2 86.87,65.88 87.76,66.77 89.53,66.77 92.46,63.84 92.46,62.32 R2-PINH1.2 92.58,62.19 107.06,47.72 107.06,35.65
  Top 0.127: v19.81,34.51 18.8,33.49 | 4.57,75.4 4.57,64.99 v6.35,63.21
  Bottom 0.127: v54.36,109.06 v48.39,103.09 23.88,103.09 v19.18,107.79 | v38.86,50.64 34.16,50.64 v33.66,50.13 33.15,50.64 32.89,50.64 31.62,49.37 20.45,49.37 6.6,63.21 v6.35,63.21 | v19.81,34.51 19.81,36.67 v20.07,36.92
32KHZ
  Top 0.127: R2-PINH1.1 92.46,61.05 89.53,63.97 89.53,66.39 89.41,66.51 88.52,66.51 87.5,65.5 87.5,65.24 84.96,62.7 U3.1 84.84,62.58 84.84,62.19 80.52,57.88 80.52,52.42 77.6,49.49 77.6,40.48 75.95,38.83 74.93,38.83 74.55,39.21 72.9,39.21 68.71,35.02 18.67,35.02 18.03,35.65 18.03,40.6 U2.9
DN
  Top 0.127: 163.32,54.07 163.58,53.81 164.08,53.81 J2.B7 | 163.32,54.07 163.32,54.45 163.58,54.7 164.08,54.7 J2.A7 | 163.32,54.07 157.1,54.07 151.76,48.73 151.76,48.61 151.26,48.1 D1.4
DP  (via drill 0.3)
  Top 0.127: J2.A6 164.21,54.32 164.72,54.32 164.97,54.57 164.97,54.95 164.72,55.21 164.21,55.21 J2.B6 164.08,55.21 v160.66,55.21 | v152.65,47.21 151.64,46.19 151.26,46.19 D1.6
  Bottom 0.127: v160.66,55.21 v152.65,47.21
EPD_3V3  (via drill 0.3)
  Top 0.127: 80.14,38.57 73.41,38.57 Q2.2 | 80.14,38.57 80.52,38.95 82.17,38.95 88.77,45.56 88.77,46.95 L1.2 | 80.14,38.57 80.9,37.81 80.9,36.54 C7.1 81.53,36.54 v81.79,36.29 | J1.16 86.36,14.19 86.74,14.19 J1.15 86.87,14.19 86.87,15.08 v89.15,17.36 | TP17.TP 108.33,17.62 106.81,17.62 100.2,11.01 94.49,11.01 94.36,11.14 94.36,12.66 95.12,13.43 95.12,19.14 95,19.27 91.82,19.27 91.31,18.76 90.42,18.76 EPD_C5.1 90.42,18.63 v89.79,18
  Bottom 0.127: v89.15,17.36 v89.79,18 81.79,26 v81.79,36.29
EPD_3V3_C  (via drill 0.3)
  Top 0.127: Q2.1 73.28,40.35 73.03,40.1 70.61,40.1 R_CL1.1 70.48,40.1 v69.85,40.73 | v40.01,51.27 38.61,52.67 25.78,52.67 20.57,57.88 20.57,58.13 U2.18 | v105.28,15.46 104.01,14.19 104.01,13.04 TP13.TP
  Bottom 0.127: v40.01,51.27 59.31,51.27 v69.85,40.73 67.82,38.7 67.82,36.29 73.15,30.95 73.15,23.71 72.9,23.46 72.9,22.32 80.39,14.82 86.74,14.82 88.52,16.6 101.73,16.6 102.87,15.46 v105.28,15.46
EPD_BUSY  (via drill 0.3)
  Top 0.127: v89.79,14.95 89.79,14.19 J1.9 | v107.19,14.95 110.36,14.95 112.9,17.49 TP9.TP | v16.26,47.72 16.26,51.14 10.41,56.99 10.41,58.13 U2.26 | v36.96,27.01 58.55,27.01 v71.5,14.06
  Bottom 0.127: v107.19,14.95 v89.79,14.95 88.39,13.55 78.11,13.55 77.6,14.06 v71.5,14.06 | v36.96,27.01 v16.26,47.72
EPD_CS  (via drill 0.3)
  Top 0.127: v89.15,12.79 88.27,13.68 88.27,14.06 J1.12 | v111.63,12.79 112.39,12.79 112.9,13.3 TP10.TP | v69.98,36.92 68.33,38.57 R9.1 68.2,38.57 65.91,36.29 18.8,36.29 18.54,36.54 18.54,37.3 20.45,39.21 20.45,40.6 U2.11 | v72.77,34.64 72.77,33.75 D6.2
  Bottom 0.127: v111.63,12.79 107.7,12.79 | 107.7,12.79 v89.15,12.79 | v69.98,36.92 70.48,36.92 72.52,34.89 | v72.77,34.64 72.52,34.89 | 107.7,12.79 107.7,19.39 93.73,33.36 93.73,43.65 93.34,44.03 81.66,44.03 72.52,34.89
EPD_DC  (via drill 0.3)
  Top 0.127: v89.79,15.58 88.77,14.57 88.77,14.19 J1.11 | TP11.TP 104.01,17.49 v102.11,15.58 v98.81,12.28 | v18.8,34.13 12.95,39.97 12.95,40.6 U2.5
  Bottom 0.127: v102.11,15.58 v89.79,15.58 | v18.8,34.13 40.64,12.28 v98.81,12.28
EPD_RST  (via drill 0.3)
  Top 0.127: v89.66,13.3 89.28,13.68 89.28,14.06 J1.10 | v106.81,13.3 108.08,13.3 108.2,13.17 TP12.TP | v16.13,46.57 16.76,47.21 16.76,58.13 U2.21
  Bottom 0.127: v106.81,13.3 v89.66,13.3 40.64,13.3 22.86,31.08 22.86,34.76 16.13,41.49 v16.13,46.57
FLASH_CS
  Top 0.127: D9.2 32.64,40.73 31.37,42 29.34,42 R5.1 29.21,42.13 26.04,45.3 | 26.04,45.3 25.27,46.06 25.27,48.35 28.83,51.91 32.89,51.91 U1.1 | 26.04,45.3 21.84,41.11 21.84,40.73 U2.12
GDR  (via drill 0.3)
  Top 0.127: v92.84,16.09 93.22,15.71 93.22,14.19 J1.2 | v78.23,14.06 77.98,14.06 77.47,14.57 R4.2 77.34,14.7 77.34,15.08 74.3,18.12 73.66,18.12 72.9,17.36 72.64,17.36 Q3.1
  Bottom 0.127: v92.84,16.09 89.53,16.09 87.5,14.06 v78.23,14.06
GND  (via drill 0.3)
  Top 0.127: 147.57,48.35 147.57,47.84 C4_USB.2 | 147.57,48.35 141.22,54.7 TP5.TP 141.1,54.83 130.43,54.83 127.64,57.62 TP4.TP 127.51,57.62 127,57.62 123.7,54.32 123.7,48.35 124.08,47.97 | U4.4 131.32,46.57 131.57,46.57 132.21,47.21 U4.9 | U4.9 132.33,47.34 131.7,47.97 131.32,47.97 U4.1 131.19,48.1 128.14,48.1 C2_BAT.2 128.02,47.97 124.08,47.97 | U4.6 133.22,47.08 132.46,47.08 132.33,47.21 U4.9 | 124.08,47.97 122.68,46.57 122.68,45.81 123.19,45.3 123.44,45.3 U10.2 | C1.2 146.94,2.25 C2.2 148.59,2.25 148.59,2.5 151.51,5.43 151.51,6.44 | 151.51,6.44 151.13,6.82 151.13,7.08 SENSOR2.7 151,7.2 151,8.09 150.37,8.73 150.37,10 SENSOR2.1 | 151.51,6.44 152.27,6.44 152.65,6.82 152.65,7.08 SENSOR2.5 152.78,7.2 163.45,17.87 165.23,17.87 J3.1 165.35,18 165.61,18 166.24,18.63 166.24,26.51 154.81,37.94 | C1_BAT.2 118.11,44.03 118.11,42.51 120.4,40.22 R2_BAT.1 120.52,40.1 121.03,39.59 | 121.03,39.59 123.57,37.05 123.57,36.54 C3.- | 109.6,35.14 110.49,35.14 R1_PWRUSB.1 | 109.6,35.14 108.2,35.14 C1_BAT2.2 108.08,35.14 v107.19,35.14 | 112.14,30.7 112.14,30.32 C1_BAT1.2 112.27,30.19 112.9,29.55 115.19,29.55 119.13,33.49 119.13,34.38 | 112.14,30.7 109.6,33.24 109.6,35.14 | 119.13,34.38 118.75,34.76 118.49,34.76 IC4.2 | 121.03,39.59 116.33,34.89 116.33,33.49 113.79,30.95 112.39,30.95 112.14,30.7 | C5_USB.2 156.46,48.73 155.57,48.73 154.05,47.21 153.8,47.21 D1.2 153.67,47.08 153.42,47.08 152.4,46.06 152.4,44.29 R2-USB1.1 152.27,44.16 153.67,42.76 R2-USB.2 153.67,42.64 153.03,42 153.03,38.06 153.16,37.94 | J2.B12 164.08,51.4 164.08,51.27 J2.A1 164.21,51.14 164.21,49.88 164.59,49.49 J2.MP3
  Top 0.127: J2.MP3 164.72,49.37 168.53,49.37 J2.MP1 168.66,49.49 168.66,59.53 J2.MP2 168.53,59.65 164.72,59.65 J2.MP4 164.59,59.53 164.21,59.15 164.21,57.88 J2.A12 164.08,57.75 164.08,57.62 J2.B1 164.08,57.5 159.38,57.5 150.24,48.35 147.57,48.35 | 154.81,37.94 153.16,37.94 | 154.81,37.94 164.59,47.72 164.59,49.37 J2.MP3 | 119.13,34.38 122.17,34.38 122.43,34.64 126.75,34.64 128.27,33.11 139.06,33.11 143.89,37.94 153.16,37.94 | 85.22,13.17 85.72,13.68 85.72,14.06 J1.17 | 85.22,13.17 83.69,11.65 81.28,11.65 J1.MP2 81.15,11.65 79.12,11.65 76.2,14.57 R4.1 | 85.22,13.17 86.11,12.28 89.28,12.28 90.17,13.17 90.17,14.06 J1.8 90.3,14.19 90.3,16.86 89.28,17.87 89.28,20.03 | J1.MP1 94.87,11.65 94.87,12.79 95.38,13.3 95.38,19.27 94.74,19.9 94.49,19.9 EPD_C1.2 94.36,20.03 92.46,20.03 EPD_C2.2 92.33,20.03 90.42,20.03 EPD_C5.2 90.3,20.03 89.28,20.03 | SJ1.1 71.88,11.01 71.88,12.92 R2.1 72.01,13.04 72.01,21.68 72.14,21.81 | 72.14,21.81 73.28,22.95 74.68,22.95 EPD_C12.2 74.8,22.95 77.22,22.95 EPD_C11.2 77.34,22.82 78.23,22.82 80.26,20.79 80.26,20.16 EPD_C10.2 80.39,20.03 81.92,20.03 EPD_C9.2 82.04,20.03 83.82,20.03 EPD_C8.2 83.95,20.03 EPD_C7.2 87.38,20.03 EPD_C6.2 87.5,20.03 89.28,20.03 | 92.71,52.8 93.98,52.8 94.36,52.42 C10_SUPERCAP.2 | 92.71,52.8 91.06,52.8 88.65,50.38 84.84,50.38 84.2,51.02 C8.2 | 92.71,43.4 93.47,42.64 93.98,42.64 D3.1 94.11,42.64 v95,42.64 | 92.71,52.8 92.71,49.88 | 92.71,49.88 92.71,43.4 | 92.71,49.88 83.69,49.88 81.15,52.42 81.15,53.18 U3.13 | 34.92,28.16 37.21,28.16 D11.1 37.34,28.29 41.27,28.29 D10.1 41.4,28.29 65.66,28.29 | 34.92,28.16 33.66,28.16 D12.1
  Top 0.127: 65.66,28.29 65.79,28.29 71.12,33.62 D6.1 71.25,33.75 74.04,36.54 C7.2 79.76,36.54 80.52,35.78 81.92,35.78 89.53,43.4 92.71,43.4 | 65.66,28.29 72.14,21.81 | C10.2 67.69,107.79 66.42,107.79 65.91,108.3 CHANGE_BUTTON.2 65.79,108.42 62.48,108.42 CHANGE_BUTTON.1 62.36,108.3 61.72,108.3 60.58,107.15 54.1,107.15 53.21,108.04 C5.2 53.09,108.17 50.8,108.17 50.67,108.3 RESET_BUTTON.2 50.55,108.42 49.66,108.42 | 49.78,102.58 49.28,102.07 47.62,102.07 IC1.3 47.5,101.95 41.78,107.66 27.69,107.66 C6.2 27.56,107.79 26.29,107.79 25.78,108.3 BOOT_BUTTON.2 25.65,108.42 22.35,108.42 BOOT_BUTTON.1 22.23,108.3 22.23,107.15 v20.7,105.63 | 49.78,102.58 53.21,102.58 C_DELAY.2 | 49.66,108.42 47.24,108.42 RESET_BUTTON.1 | 49.78,102.58 49.78,103.34 49.66,103.47 49.66,108.42 | 13.59,98.9 11.56,100.93 10.41,100.93 8.51,99.02 C9.2 8.38,98.9 6.48,98.9 3.3,95.72 J4.G4 3.3,95.59 3.3,95.21 5.21,93.31 5.33,93.31 5.71,92.93 | 13.59,98.9 13.72,98.77 14.22,98.77 D8.1 | 5.71,92.93 5.84,92.8 J4.P6 5.71,92.93 | 5.71,92.93 2.29,89.5 2.29,82.51 J4.G3 | D9.1 32.77,42.25 32.89,42.38 32.89,48.1 U1.4 32.89,48.22 v25.78,48.22 | U2.29_7 14.86,46.83 14.86,47.84 U2.29_8 14.86,47.97 14.86,49.11 U2.29_9 14.73,49.24 13.59,49.24 U2.29_6 | U2.29_4 13.59,46.83 13.59,47.84 U2.29_5 13.59,47.97 13.59,49.11 U2.29_6 | U2.29_3 12.32,49.24 13.46,49.24 U2.29_6 | U2.29_3 12.32,49.11 12.32,47.97 U2.29_2 12.32,47.84 12.32,46.83 U2.29_1 12.19,46.7 v11.56,46.06 | U2.29_3 12.19,49.24 7.87,53.56 7.87,58.13 U2.28 7.87,58.26 7.87,61.81 16.38,70.32 16.38,85.44 J4.G1 16.51,85.56 16.51,86.58 17.27,87.34 17.27,90.39 16.51,91.15 J4.G2 16.38,91.28 v13.34,94.33
  Top 0.127: v7.87,42.38 7.87,40.73 U2.1 | v34.8,47.72 36.7,49.62 36.7,50 U1.9 | v13.34,98.64 13.59,98.9 | v34.92,30.19 34.92,28.16
  Bottom 0.127: v7.87,42.38 v11.56,46.06 13.72,48.22 v25.78,48.22 26.29,47.72 v34.8,47.72 34.92,47.59 v34.92,30.19 | v13.34,94.33 v13.34,98.64 20.32,105.63 v20.7,105.63 | v107.19,35.14 102.49,35.14 v95,42.64
  pour Bottom: 6.46,40.36 6.44,40.34 6.42,40.32 0.08,40.32 0.08,0.08 78.92,0.12 78.92,10.12 78.94,10.14 78.96,10.16 78.98,10.18 97.21,10.18 97.24,10.16 97.26,10.14 97.27,10.12 97.27,0.13 170.12,0.18 170.02,67.22 92.12,67.32 92.11,67.32 92.1,67.32 92.08,67.32 92.08,67.32 92.08,67.32 92.07,67.33 92.06,67.34 92.06,67.34 92.06,67.34 92.05,67.35 92.04,67.36 92.04,67.36 92.04,67.36 92.03,67.37 92.02,67.38 92.02,67.38 92.02,67.39 92.02,67.4 92.02,67.42 92.02,67.42 92.12,111.32 69.63,111.32 68.95,110.65 68.94,110.64 68.94,110.64 68.94,110.64 68.93,110.63 68.92,110.62 68.92,110.62 68.92,110.62 68.9,110.62 18.72,110.52 18.72,110.52 18.7,110.52 18.68,110.52 18.68,110.52 18.68,110.52 18.67,110.53 18.66,110.54 18.66,110.54 18.66,110.54 18.65,110.55 18.64,110.56 18.64,110.56 17.97,111.22 0.08,111.22 0.08,58.52 6.42,58.52 6.44,58.51 6.46,58.48 6.48,58.46 6.48,40.38
  pour Top: 6.46,40.36 6.44,40.34 6.42,40.32 0.08,40.32 0.08,0.08 78.92,0.12 78.92,10.12 78.94,10.14 78.96,10.16 78.98,10.18 97.21,10.18 97.24,10.16 97.26,10.14 97.27,10.12 97.27,0.13 170.12,0.18 170.02,67.22 92.12,67.32 92.11,67.32 92.1,67.32 92.08,67.32 92.08,67.32 92.08,67.32 92.07,67.33 92.06,67.34 92.06,67.34 92.06,67.34 92.05,67.35 92.04,67.36 92.04,67.36 92.04,67.36 92.03,67.37 92.02,67.38 92.02,67.38 92.02,67.39 92.02,67.4 92.02,67.42 92.02,67.42 92.12,111.32 69.63,111.32 68.95,110.65 68.94,110.64 68.94,110.64 68.94,110.64 68.93,110.63 68.92,110.62 68.92,110.62 68.92,110.62 68.9,110.62 18.72,110.52 18.72,110.52 18.7,110.52 18.68,110.52 18.68,110.52 18.68,110.52 18.67,110.53 18.66,110.54 18.66,110.54 18.66,110.54 18.65,110.55 18.64,110.56 18.64,110.56 17.97,111.22 0.08,111.22 0.08,58.52 6.42,58.52 6.44,58.51 6.46,58.48 6.48,58.46 6.48,40.38
GPIO8
  Top 0.127: R1.1 19.18,35.65 18.8,36.03 18.67,36.03 18.29,36.41 18.29,39.46 19.18,40.35 19.18,40.6 U2.10
I2C_PW  (via drill 0.3)
  Top 0.127: R2-PINH.2 153.16,4.15 R1_PINH.2 151.38,4.03 149.22,1.87 149.22,1.74 149.1,1.61 146.3,1.61 146.18,1.74 146.18,4.03 146.3,4.15 | SENSOR2.6 151.76,7.2 151.76,9.11 151.13,9.74 151.13,10 SENSOR2.2 151,10.12 151,10.38 150.5,10.89 149.99,10.89 149.73,10.63 149.73,8.98 150.24,8.47 150.24,7.2 SENSOR2.8 150.24,7.08 149.22,7.08 146.3,4.15 | v26.54,53.18 21.84,57.88 21.84,58.13 U2.17 | 146.3,4.15 v146.18,4.28
  Bottom 0.127: v26.54,53.18 86.11,53.18 103.63,35.65 114.81,35.65 v146.18,4.28
INT_RTC
  Top 0.127: U2.8 16.76,40.73 16.76,40.98 28.19,52.42 33.53,52.42 34.29,51.65 34.29,47.59 34.67,47.21 38.73,47.21 40.51,48.99 69.09,48.99 82.3,62.19 82.3,62.58 U3.3 82.42,62.7 82.42,65.88 R1_PINH1.1 82.42,66 78.23,70.2 77.09,70.2 TP15.TP
IO/BOOT
  Top 0.127: C6.1 27.56,109.06 26.54,109.06 25.78,109.82 BOOT_BUTTON.3 25.65,109.95 22.35,109.95 BOOT_BUTTON.4 22.23,109.82 20.19,107.79 20.19,107.53 R_BOOT.1 20.19,107.41 20.19,105.5 24.26,101.44 24.26,58.26 U2.15
IO/CHANGE  (via drill 0.3)
  Top 0.127: R_CHANGE.1 60.2,107.91 62.1,109.82 62.36,109.82 CHANGE_BUTTON.4 62.48,109.95 65.79,109.95 CHANGE_BUTTON.3 65.91,109.82 66.67,109.06 67.69,109.06 C10.1 67.82,108.93 68.45,108.3 68.45,107.28 v29.21,68.04 | v23.75,68.04 14.22,58.51 14.22,58.26 U2.23
  Bottom 0.127: v29.21,68.04 v23.75,68.04
MISO  (via drill 0.3)
  Top 0.127: v34.16,21.17 33.4,20.41 R8.1 | v34.42,28.92 33.66,29.68 D12.2 | U1.2 33.02,50.64 v33.02,50.13 v27.69,50.13 | v11.94,65.24 9.14,62.45 9.14,58.26 U2.27 | v11.94,75.66 12.95,76.67 TP6.TP | v9.14,91.02 6.35,93.82 6.1,93.82 J4.P7
  Bottom 0.127: 34.16,26.51 34.16,28.67 v34.42,28.92 | 34.16,26.51 v34.16,21.17 | v33.02,50.13 37.47,45.68 37.47,26.89 37.08,26.51 34.16,26.51 | v9.14,91.02 9.14,78.45 v11.94,75.66 v11.94,65.24 11.94,58.64 20.57,50 20.83,50 20.95,50.13 v27.69,50.13
MOSI  (via drill 0.3)
  Top 0.127: v42.04,48.22 40.77,48.22 U1.5 | v38.23,30.19 37.72,30.19 37.34,29.81 D11.2 | v7.24,89.12 6.99,89.37 6.1,89.37 J4.P3 | v7.24,78.32 9.02,76.55 TP7.TP | v86.36,12.79 87.25,13.68 87.25,14.06 J1.14 | v44.96,12.79 37.47,20.28 R7.1 37.34,20.41 v36.7,21.05 | v15.49,38.06 15.49,40.6 U2.7
  Bottom 0.127: v42.04,48.22 42.04,30.57 41.66,30.19 v38.23,30.19 38.23,22.57 v36.7,21.05 | v7.24,89.12 v7.24,78.32 6.22,78.32 4.7,76.8 4.7,60.67 7.37,58 7.37,42.25 11.56,38.06 v15.49,38.06 40.77,12.79 v44.96,12.79 v86.36,12.79
N$1
  Top 0.127: 128.14,35.4 128.78,34.76 128.78,33.75 D2.1 | 128.14,35.4 128.14,37.56 130.56,39.97 Q1.2 | 118.36,33.87 114.81,30.32 113.54,30.32 C1_BAT1.1 | 118.36,33.87 117.73,34.51 117.73,35.27 117.86,35.4 117.98,35.4 118.36,35.78 IC4.3 118.49,35.91 119.25,35.14 124.84,35.14 125.09,35.4 128.14,35.4 | 118.36,33.87 IC4.1
N$2  (via drill 0.3)
  Top 0.127: v151.76,43.4 152.4,42.76 R2-USB.1 | v163.19,55.84 163.58,56.23 164.08,56.23 J2.B5
  Bottom 0.127: v151.76,43.4 151.76,44.41 v163.19,55.84
N$3
  Top 0.127: R2_BAT.2 120.52,41.49 120.52,44.03 120.78,44.29 U10.5
N$4
  Top 0.127: R2-USB1.2 153.8,44.29 154.81,45.3 154.81,45.43 162.56,53.18 164.08,53.18 J2.A5
N$5
  Top 0.127: C1.1 146.94,3.52 148.46,3.52 C2.1
N$6
  Top 0.127: 91.06,42 94.74,42 94.87,42.13 96.27,42.13 C4.1 | 91.06,42 90.55,42.51 D3.2 | 91.06,42 90.55,41.49 90.55,39.21 D4.1
N$7
  Top 0.127: C_DELAY.1 53.21,103.85 50.42,103.85 IC1.5
N$8
  Top 0.127: CHG_LED.C 117.09,46.06 115.06,46.06 114.55,45.56 113.54,45.56 112.9,46.19 R1_BAT.1
N$9
  Top 0.127: R1_BAT.2 114.3,46.32 116.2,46.32 116.71,46.83 121.41,46.83 122.43,45.81 122.43,45.05 123.06,44.41 123.44,44.41 U10.1
N$15
  Top 0.127: J1.5 91.82,14.19 91.82,18.12 92.33,18.63 EPD_C2.1
N$16
  Top 0.127: J1.4 92.33,14.19 92.33,16.6 94.36,18.63 EPD_C1.1
N$19
  Top 0.127: J1.24 82.17,14.19 74.68,21.68 EPD_C12.1
N$20
  Top 0.127: D7.1 88.9,65.75 88.9,62.96 81.79,55.84 81.79,52.16 83.82,50.13 89.53,50.13 91.57,52.16 R_CAPACITOR.1
N$21
  Top 0.127: J1.22 83.19,14.19 83.19,15.97 80.39,18.76 EPD_C10.1
N$23
  Top 0.127: J1.20 84.2,14.19 84.2,18.38 83.95,18.63 EPD_C8.1
N$24
  Top 0.127: J1.19 84.84,14.19 84.84,18 85.47,18.63 EPD_C7.1
N$25
  Top 0.127: J1.18 85.34,14.19 85.34,16.6 87.38,18.63 EPD_C6.1
PREVGH  (via drill 0.3)
  Top 0.127: J1.21 83.69,14.19 83.69,16.98 82.04,18.63 EPD_C9.1 81.92,18.76 v81.28,19.39 | v83.44,40.86 83.44,44.16 82.3,45.3 82.3,47.97 D5.1
  Bottom 0.127: v83.44,40.86 83.44,38.57 81.28,36.41 v81.28,19.39
PREVGL  (via drill 0.3)
  Top 0.127: 77.34,21.55 77.34,20.54 82.68,15.2 82.68,14.19 J1.23 | v78.49,23.59 93.98,39.08 D4.2 | 77.34,21.55 v78.11,22.32 | 77.34,21.55 EPD_C11.1
  Bottom 0.127: v78.49,23.59 78.49,22.7 v78.11,22.32
RESE
  Top 0.127: J1.3 92.71,14.06 92.71,13.68 90.04,11.01 76.58,11.01 76.45,11.14 R3.2 76.33,11.27 74.04,13.55 74.04,17.24 Q3.2
RESE'
  Top 0.127: R2.2 73.28,12.92 73.28,11.01 SJ1.2 73.41,10.89 74.3,10 76.33,10 R3.1
RESET  (via drill 0.3)
  Top 0.127: C5.1 53.09,109.56 50.93,109.56 50.67,109.82 RESET_BUTTON.3 50.55,109.95 47.24,109.95 RESET_BUTTON.4 47.12,109.82 45.09,107.79 44.96,107.79 | 44.96,107.79 44.7,108.04 R_RESET.1 44.96,107.79 | 44.96,107.79 47.5,105.25 47.5,103.98 IC1.1 47.62,103.85 48.26,103.85 48.9,103.22 v48.9,102.71 | v11.05,41.87 10.41,41.24 10.41,40.73 U2.3 | v20.7,50.51 v12.06,41.87
  Bottom 0.127: v12.06,41.87 v11.05,41.87 | v20.7,50.51 20.7,54.83 33.53,67.66 41.91,67.66 48.9,74.64 v48.9,102.71
RTC_RST
  Top 0.127: U2.16 23.11,58.13 23.11,57.88 23.75,57.24 30.23,57.24 41.66,68.67 75.31,68.67 81.03,62.96 81.03,62.7 U3.4
RX
  Top 0.127: U2.24 12.95,58.26 12.95,61.81 13.72,62.58 TP2.TP
SCK  (via drill 0.3)
  Top 0.127: v87.5,14.95 87.76,14.7 87.76,14.19 J1.13 | v47.12,14.57 41.27,20.41 R6.1 41.27,20.54 41.27,20.79 41.91,21.43 41.91,22.19 37.59,26.51 34.04,26.51 32.89,27.65 32.89,30.32 33.27,30.7 v41.53,30.7 41.53,29.94 41.4,29.81 D10.2 | 3.68,76.67 3.68,89.88 5.46,91.66 5.97,91.66 J4.P5 | v41.53,49.49 40.77,49.49 U1.6 | v24.38,51.14 14.22,40.98 14.22,40.73 U2.6 | v5.21,76.67 3.68,76.67 | 3.68,76.67 TP8.TP
  Bottom 0.127: v87.5,14.95 87.25,14.95 86.87,14.57 v47.12,14.57 | v41.53,30.7 v41.53,49.49 41.15,49.49 39.5,51.14 28.19,51.14 | 28.19,51.14 v24.38,51.14 | v5.21,76.67 5.21,64.99 20.57,49.62 27.81,49.62 28.19,50 28.19,51.14
SCL  (via drill 0.3)
  Top 0.127: v21.21,54.7 18.03,57.88 18.03,58.13 U2.20 | v83.82,54.7 84.84,53.69 84.84,53.3 U3.16 | v139.06,42 133.6,47.46 133.35,47.46 U4.7 | SENSOR2.4 152.65,10.12 152.65,10.38 v152.02,11.01 151.89,11.14 149.86,11.14 145.67,6.95 145.67,1.87 146.18,1.36 151.13,1.36 152.65,2.88 153.16,2.88 R2-PINH.1 | v164.08,20.92 165.23,20.92 J3.4
  Bottom 0.127: v21.21,54.7 v83.82,54.7 84.96,54.7 97.66,42 v139.06,42 139.06,23.97 v152.02,11.01 161.93,20.92 v164.08,20.92
SDA  (via drill 0.3)
  Top 0.127: v21.97,55.21 19.3,57.88 19.3,58.13 U2.19 | v82.3,55.21 82.3,54.95 83.57,53.69 83.57,53.3 U3.15 | 149.86,11.52 145.41,7.08 145.41,1.74 146.05,1.11 152.53,1.11 153.92,2.5 153.92,3.27 153.67,3.52 152.65,3.52 152.02,2.88 151.51,2.88 R1_PINH.1 | 149.86,11.52 152.27,11.52 153.16,10.63 153.16,9.49 153.03,9.36 152.27,9.36 151.89,9.74 151.89,10 SENSOR2.3 | v136.4,47.97 133.35,47.97 U4.8 | v146.94,37.43 164.34,20.03 165.23,20.03 J3.3 | 149.86,11.52 149.86,33.49 v146.94,36.41
  Bottom 0.127: v21.97,55.21 v82.3,55.21 91.95,55.21 99.19,47.97 v136.4,47.97 v146.94,37.43 v146.94,36.41
SRC  (via drill 0.3)
  Top 0.127: v93.22,43.53 96.27,43.53 C4.2 | v81.79,43.53 80.52,43.53 78.74,45.3 78.74,47.97 D5.2 78.74,48.1 79.25,48.61 82.93,48.61 84.2,47.34 84.2,46.95 L1.1 | v73.41,22.44 73.41,19.52 Q3.3
  Bottom 0.127: v93.22,43.53 v81.79,43.53 73.41,35.14 v73.41,22.44
SS_SD
  Top 0.127: 11.18,97.75 10.41,98.52 10.41,99.66 11.05,100.29 R10.1 | 11.18,97.75 14.99,97.75 15.88,98.64 D8.2 | 7.11,88.48 7.24,88.48 11.18,92.42 11.18,97.75 | 7.11,88.48 6.48,88.48 J4.P2 7.11,88.48 | 7.11,88.48 7.11,86.96 6.73,86.58 6.73,78.2 6.86,78.07 6.86,50.13 11.56,45.43 11.56,40.73 U2.4
TX
  Top 0.127: U2.25 11.56,58.26 11.56,62.58 TP1.TP
USB_D+  (via drill 0.3)
  Top 0.127: v153.67,45.05 153.67,46.06 D1.1 | v76.45,55.72 76.2,55.72 67.44,46.95 v34.16,46.95 | v27.94,40.73 24.38,40.73 U2.14
  Bottom 0.127: v153.67,45.05 153.67,44.67 151.89,42.89 142.11,42.89 136.4,48.61 98.93,48.61 91.82,55.72 v76.45,55.72 | v27.94,40.73 v34.16,46.95
USB_D-  (via drill 0.3)
  Top 0.127: v152.53,48.1 153.67,48.1 D1.3 | v77.6,56.23 75.95,54.57 75.44,54.57 66.42,45.56 v34.16,45.56 | v30.1,41.49 25.15,41.49 24.89,41.75 23.88,41.75 23.11,40.98 23.11,40.73 U2.13
  Bottom 0.127: v152.53,48.1 137.29,48.1 129.16,56.23 v77.6,56.23 | v30.1,41.49 v34.16,45.56
VBAT
  Top 0.127: U4.2 131.32,47.46 131.32,47.08 U4.3 131.19,46.95 130.68,46.95 129.29,45.56 | 129.29,45.56 128.14,46.7 C2_BAT.1 128.02,46.7 127.64,46.32 123.57,46.32 U10.3 | 129.29,45.56 129.54,45.3 129.54,42.25 Q1.3 129.67,42.13 130.3,41.49 139.19,41.49 141.1,43.4 141.1,49.75 TP3.TP
VBUS
  Top 0.127: 131.19,39.97 131.19,38.19 128.91,35.91 D2.2 | 131.19,39.97 131.19,40.6 131.06,40.73 130.05,40.73 129.41,40.1 128.78,40.1 Q1.1 128.65,40.1 126.49,40.1 120.9,45.68 120.9,46.19 U10.4 120.78,46.19 118.75,46.19 CHG_LED.A 118.62,46.06 116.71,44.16 C1_BAT.1 116.71,44.03 116.71,39.72 110.87,33.87 110.62,33.87 R1_PWRUSB.2 | 149.61,46.57 150.37,46.57 150.88,47.08 151.13,47.08 D1.5 151.26,47.21 151.64,47.21 152.02,47.59 152.02,48.61 153.42,50 156.46,50 C5_USB.1 | 149.61,46.57 147.7,46.57 C4_USB.1 147.57,46.57 140.46,53.69 124.97,53.69 TP14.TP | 149.61,46.57 149.61,40.1 PFMF.050.1.2 149.48,39.97 131.19,39.97
VRTC
  Top 0.127: C10_SUPERCAP.1 94.36,54.45 93.47,53.56 91.69,53.56 R_CAPACITOR.2 91.57,53.43 87.88,53.43 85.6,51.14 C8.1 85.47,51.14 85.22,51.14 84.33,52.03 83.19,52.03 82.42,52.8 82.42,53.18 U3.14
VUSB
  Top 0.127: J2.A9 164.08,56.99 164.08,56.86 J2.B4 164.21,56.73 164.72,56.73 165.23,56.23 165.23,52.8 164.72,52.29 164.21,52.29 J2.B9 164.08,52.16 164.08,52.03 J2.A4 164.08,51.91 163.58,51.91 154.31,42.64 154.31,40.35 154.05,40.1 PFMF.050.1.1